# Altium PCB Backplane3_0.PcbDoc
Units mm, origin at the board's own origin, x right, y up, seen from the top; angles counter-clockwise.
Board outline 171.45 x 76.2 mm, 2 copper layers (Top Layer, Bottom Layer); 9 components, 8 nets, 151 pads, 0 vias.
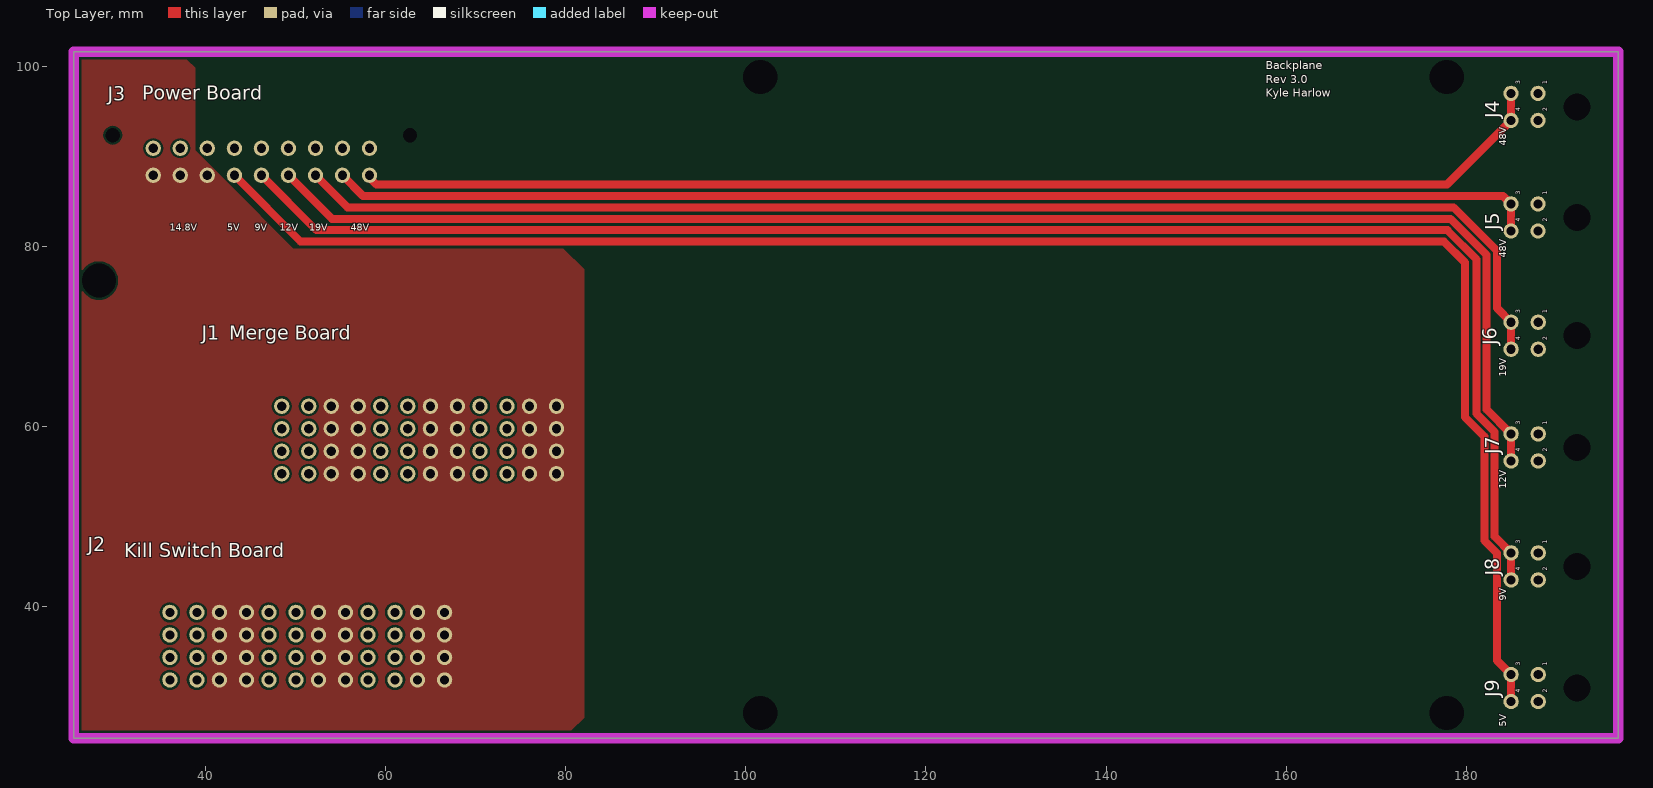
[diagram p0: Top Layer view]
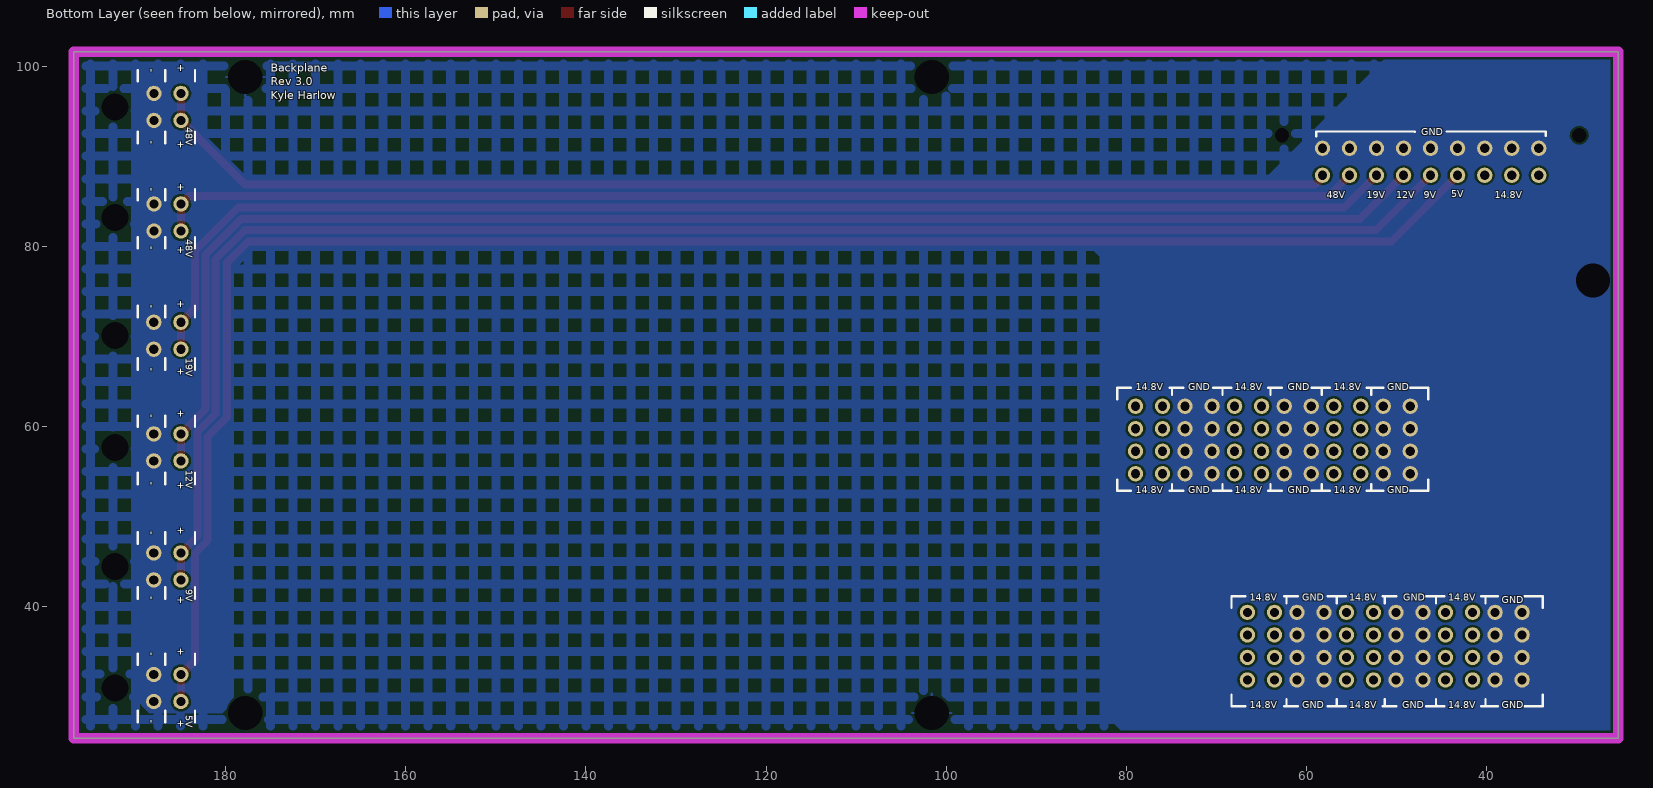
[diagram p1: Bottom Layer view, seen from below]
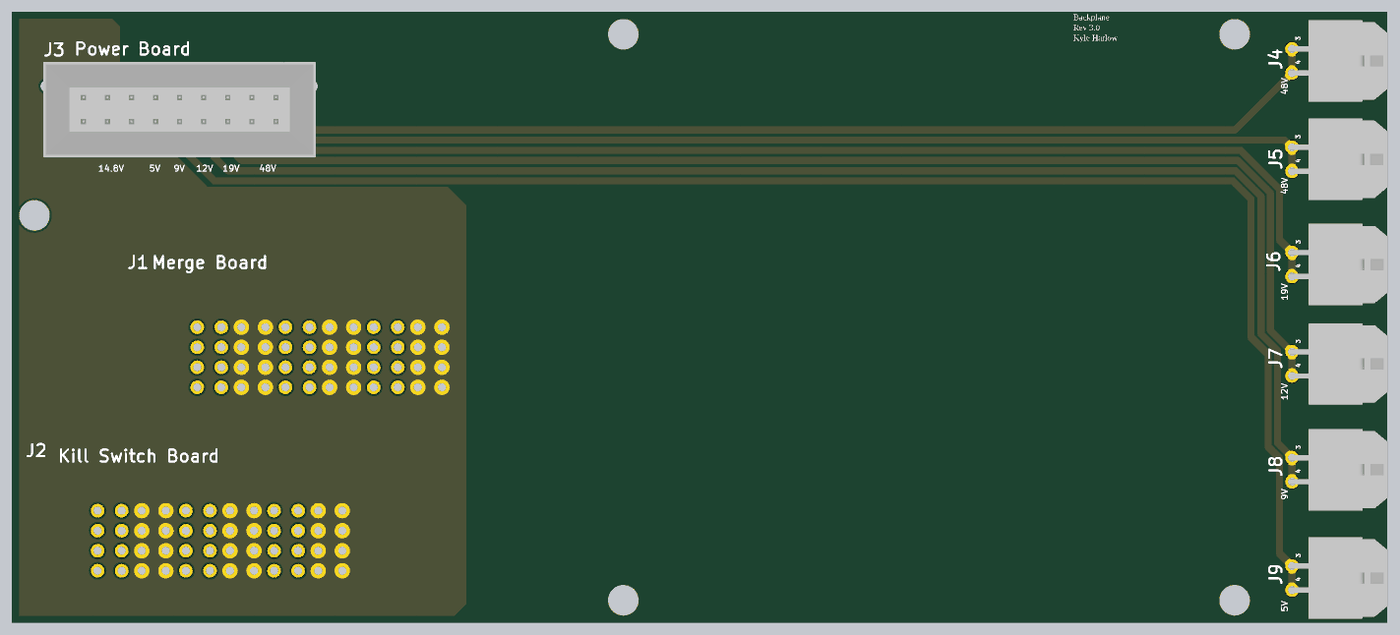
[diagram p2: 3D render of the assembled board from above, using the file's embedded part models]

## Layer stack, top to bottom
Top Solder: solder mask 0.0102, Solder Resist, Dk 3.5
Top Layer: signal copper 0.0356
Dielectric 1: dielectric 0.32, FR-4, Dk 4.8
Bottom Layer: signal copper 0.0356
Bottom Solder: solder mask 0.0102, Solder Resist, Dk 3.5

## Board outline
25.4,25.4 196.85,25.4 196.85,101.6 25.4,101.6

## Design rules (kind name [scope] priority, off if disabled: settings)
Clearance [All] p1: gap=0.254 ignorepadtopadclearanceinfootprint=FALSE
PolygonConnect PolygonConnect_5 [All vs IsNamedPolygon('Top Layer-14.8V') Or  IsNamedPolygon('Top Layer-No Net')] p1: thpad.connectstyle=Direct thpad.reliefconductorwidth=0.254 thpad.reliefentries=4 thpad.polygonreliefangle="90 Angle" thpad.airgapwidth=0.254 smdpad.connectstyle=Relief smdpad.reliefconductorwidth=0.254 smdpad.reliefentries=4 smdpad.polygonreliefangle="90 Angle" smdpad.airgapwidth=0.254 via.connectstyle=Relief via.reliefconductorwidth=0.254 via.reliefentries=4 via.polygonreliefangle="90 Angle" via.airgapwidth=0.254
PolygonConnect PolygonConnect_4 [All vs IsNamedPolygon('Bottom Layer-GND')] p2: thpad.connectstyle=Direct thpad.reliefconductorwidth=0.254 thpad.reliefentries=4 thpad.polygonreliefangle="90 Angle" thpad.airgapwidth=0.254 smdpad.connectstyle=Direct smdpad.reliefconductorwidth=0.254 smdpad.reliefentries=4 smdpad.polygonreliefangle="90 Angle" smdpad.airgapwidth=0.254 via.connectstyle=Relief via.reliefconductorwidth=0.254 via.reliefentries=4 via.polygonreliefangle="90 Angle" via.airgapwidth=0.254
PolygonConnect PolygonConnect_3 [All vs IsNamedPolygon('Bottom Layer-GND')] p3: thpad.connectstyle=NoConnect thpad.reliefconductorwidth=0.254 thpad.reliefentries=4 thpad.polygonreliefangle="90 Angle" thpad.airgapwidth=0.254 smdpad.connectstyle=Direct smdpad.reliefconductorwidth=0.254 smdpad.reliefentries=4 smdpad.polygonreliefangle="90 Angle" smdpad.airgapwidth=0.254 via.connectstyle=Relief via.reliefconductorwidth=0.254 via.reliefentries=4 via.polygonreliefangle="90 Angle" via.airgapwidth=0.254
PolygonConnect PolygonConnect_2 [All vs IsNamedPolygon('Bottom Layer-GND')] p4: thpad.connectstyle=Direct thpad.reliefconductorwidth=0.254 thpad.reliefentries=4 thpad.polygonreliefangle="90 Angle" thpad.airgapwidth=0.254 smdpad.connectstyle=Relief smdpad.reliefconductorwidth=0.254 smdpad.reliefentries=4 smdpad.polygonreliefangle="90 Angle" smdpad.airgapwidth=0.254 via.connectstyle=Relief via.reliefconductorwidth=0.254 via.reliefentries=4 via.polygonreliefangle="90 Angle" via.airgapwidth=0.254
PolygonConnect PolygonConnect_1 [All vs IsNamedPolygon('Bottom Layer- GND')] p5: thpad.connectstyle=Direct thpad.reliefconductorwidth=0.254 thpad.reliefentries=4 thpad.polygonreliefangle="90 Angle" thpad.airgapwidth=0.254 smdpad.connectstyle=Direct smdpad.reliefconductorwidth=0.254 smdpad.reliefentries=4 smdpad.polygonreliefangle="90 Angle" smdpad.airgapwidth=0.254 via.connectstyle=Relief via.reliefconductorwidth=0.254 via.reliefentries=4 via.polygonreliefangle="90 Angle" via.airgapwidth=0.254
PolygonConnect [All] p6: connectstyle=Relief reliefconductorwidth=0.254 reliefentries=4 polygonreliefangle="90 Angle" airgapwidth=0.254
RoutingVias [All] p1: holewidth=0.711 width=1.27 viastyle="Through Hole" minholewidth=0.711 minwidth=1.27 maxholewidth=0.711 maxwidth=1.27
SolderMaskExpansion [All] p1: expansion=0.102
Width [All] p1: maxlimit=40 minlimit=0.381 preferedwidth=0.889 bottomlayer_prefwidth=0.4 minimp=50.000000 maximp=50.000000 favimp=50.000000
30 further rules are at their usual default settings.

## Classes and differential pairs
component class Backplane3_0: J1 J2 J4 J5 J6 J7 J8 J9

## Components (designator, comment, footprint, x,y, rotation, side; value= is the part's Value field where it differs from the comment)
J1 "Molex464652-1150" PCBComponent_1 78.985,62.258 r180 top
J2 "Molex464652-1150" PCBComponent_1 66.568,39.37 r180 top
J3 "Molex44432-1801" Molex44432-1801 29.227,83.439 r0 top
J4 "Molex 43045-0402" Molex43045-0402 187.944,93.98 r90 top
J5 "Molex 43045-0402" Molex43045-0402 187.944,81.709 r90 top
J6 "Molex 43045-0402" Molex43045-0402 187.96,68.58 r90 top
J7 "Molex 43045-0402" Molex43045-0402 187.96,56.182 r90 top
J8 "Molex 43045-0402" Molex43045-0402 187.96,42.974 r90 top
J9 "Molex 43045-0402" Molex43045-0402 187.96,29.464 r90 top

## Footprints (in the part's own frame and the unit in brackets; to place one, negate y for a bottom-side part, rotate by r counter-clockwise, add the part's x,y. Pads: shape width x height; smd on the part's side, far side on the other; paste and mask are expansions set on the pad)
Molex43045-0402 [mm] "43045-0402"
  round 1.7 hole 1.02: 1(3,0) 2(0,0) 3(3,3) 4(0,3)
  round 0.254 hole 3 unplated: ""(1.5,-4.32)
  body extent -3.57,-8.95 6.58,3.29, height 8.83
Molex44432-1801 [mm]
  round 1.7 hole 1.02: 1(29.001,4.445) 2(26.001,4.445) 3(23.001,4.445) 4(20.001,4.445) 5(17.001,4.445) 6(14.001,4.445) 7(11.001,4.445) 8(8.001,4.445) 9(5.001,4.445) 10(29.001,7.445) 11(26.001,7.445) 12(23.001,7.445) 13(20.001,7.445) 14(17.001,7.445) 15(14.001,7.445) 16(11.001,7.445) 17(8.001,7.445) 18(5.001,7.445)
  round 1 hole 1.57 unplated: ""(0.501,8.895) ""(33.503,8.89)
  body extent 0.07,0.03 34.07,11.93, height 11.8
PCBComponent_1 [mm]
  round 1.7 hole 1.02: 1(27.5,0) 1(27.5,2.5) 1(27.5,5) 1(27.5,7.5) 1(30.5,0) 1(30.5,2.5) 1(30.5,5) 1(30.5,7.5) 2(22,0) 2(22,2.5) 2(22,5) 2(22,7.5) 2(25,0) 2(25,2.5) 2(25,5) 2(25,7.5) 3(16.5,0) 3(16.5,2.5) 3(16.5,5) 3(16.5,7.5) 3(19.5,0) 3(19.5,2.5) 3(19.5,5) 3(19.5,7.5) 4(11,7.5) 4(11,0) 4(11,2.5) 4(11,5) 4(14,0) 4(14,2.5) 4(14,5) 4(14,7.5) 5(5.5,5) 5(5.5,7.5) 5(5.5,0) 5(5.5,2.5) 5(8.5,7.5) 5(8.5,0) 5(8.5,2.5) 5(8.5,5) 6(0,7.5) 6(0,5) 6(0,2.5) 6(0,0) 6(3,7.5) 6(3,5) 6(3,2.5) 6(3,0)

## Part data
J1 J2: library part Molex46562-1150, "2.54mm, 5.50mm Pitch EXTreme Ten60Power Vertical Receptacle Assembly with Guide Receivers, 6 Power Circuits", ComponentLink1Description="Molex Website", ComponentLink1URL=https://www.molex.com/molex/products/datasheet.jsp?part=active/0465621150_PCB_RECEPTACLES.xml
J4 J5 J6 J7 J8 J9: library part Molex43045-0402, "Micro-Fit 3.0 Right Angle Header, 3.00mm Pitch, Dual Row, 4 Circuits, with Snap-in Plastic Peg PCB Lock, Gold, Glow Wire Capable, Black", ComponentLink1Description="Molex Website", ComponentLink1URL=https://www.molex.com/molex/products/datasheet.jsp?part=active/0430450402_PCB_HEADERS.xml

## Free pads (board coordinates)
  round 1.524 hole 3.81: ""(28.194,76.2) ""(101.6,28.194) ""(101.6,98.806) ""(177.8,28.194) ""(177.8,98.806)

## Nets (pads, with @x,y where several pads share a name; then routed paths per layer and width w, separated by ;. In a path a pad name is that pad's centre, name@x,y a point inside that pad or via, vN(x,y) a via of type N, cw(c..) or ccw(c..) an arc to the next point about the centre after c; other vN are vias at no path point)
5V: J3.6 J9.3 J9.4 | length 191.5
  Top Layer w0.889: J3.6 50.594,80.518 177.523,80.518 179.832,78.209 179.832,61.028 181.991,58.869 181.991,47.327 183.388,45.93 183.388,34.036 J9.3 J9.4
9V: J3.5 J8.3 J8.4 | length 175.9
  Top Layer w0.889: J3.5 52.324,81.788 177.869,81.788 181.102,78.555 181.102,61.424 183.134,59.392 183.134,47.8 J8.3 J8.4
12V: J3.4 J7.3 J7.4 | length 160.7
  Top Layer w0.889: J3.4 54.054,83.058 178.216,83.058 182.245,79.029 182.245,61.897 J7.3 J7.4
14.8V: J1.2 J1.4 J1.6 J2.2 J2.4 J2.6 J3.7 J3.8 J3.9
19V: J3.3 J6.3 J6.4 | length 146.2
  Top Layer w0.889: J3.3 55.784,84.328 178.562,84.328 183.388,79.502 183.388,73.152 J6.3 J6.4
48V_1: J3.1 J4.3 J4.4 | length 133
  Top Layer w0.889: J3.1@58.228,87.63 58.99,86.868 177.832,86.868 J4.4 J4.3
48V_2: J3.2 J5.3 J5.4 | length 134
  Top Layer w0.889: J3.2 57.514,85.598 184.055,85.598 J5.3 J5.4
GND: J1.1 J1.3 J1.5 J2.1 J2.3 J2.5 J3.10 J3.11 J3.12 J3.13 J3.14 J3.15 J3.16 J3.17 J3.18 J4.1 J4.2 J5.1 J5.2 J6.1 J6.2 J7.1 J7.2 J8.1 J8.2 J9.1 J9.2 pad.@28.194,76.2 pad.@101.6,28.194 pad.@177.8,98.806
pads on no net: J3. J4. J5. J6. J7. J8. J9.

## Polygon pours and split planes (outlines as drawn)
14.8V on Top Layer "Top Layer-14.8V" (solid, pour order 14): 79.756,79.756 82.042,77.47 82.042,27.686 79.756,25.4 25.441,25.4 25.441,26.756 25.4,26.797 25.4,83.058 25.4,101.6 37.084,101.6 38.862,99.822 38.862,90.678 49.784,79.756
no net on Top Layer "Top Layer-No Net" (solid, pour order 6): 34.925,25.4
GND on Bottom Layer "Bottom Layer- GND" (solid, pour order 12): 177.546,87.63 182.626,92.71 182.626,100.33 190.152,100.33 190.152,29.878 188.468,28.194 180.34,28.194 179.07,29.464 179.07,77.371 176.685,79.756 83.82,79.756 82.042,77.978 82.042,27.686 79.756,25.4 45.593,25.4 25.4,25.4 25.4,101.6 50.546,101.6 64.516,87.63
GND on Bottom Layer "Bottom Layer-GND 2" (hatched 90Degree grid 2.5 track 1, remove dead copper, pour order 10): 25.4,25.4 25.4,101.6 196.85,101.6 196.85,25.4

## Keep-outs
Keep-Out Layer:
  the board outline again, w1.2

## Silkscreen, mask and mechanical layers (free items; w line width, h text height)
Top Overlay:
  text "Power Board" at 33.02,96.266 h1.52
  text "Backplane  / Rev 3.0 / Kyle Harlow" at 157.734,96.266 h1.52
  text "48V" at 184.404,91.186 h0.76 r90
  text "14.8V" at 36.068,81.709 h0.76
  text "5V" at 42.418,81.709 h0.76
  text "9V" at 45.466,81.709 h0.76
  text "12V" at 48.26,81.709 h0.76
  text "19V" at 51.562,81.709 h0.76
  text "48V" at 56.134,81.709 h0.76
  text "48V" at 184.404,78.74 h0.76 r90
  text "Merge Board" at 42.672,69.62 h1.52
  text "19V" at 184.404,65.532 h0.76 r90
  text "12V" at 184.404,53.086 h0.76 r90
  text "Kill Switch Board" at 30.988,45.466 h1.52
  text "9V" at 184.404,40.64 h0.76 r90
  text "5V" at 184.404,26.67 h0.76 r90
Bottom Overlay:
  lines w0.254: 33.439,92.25 33.439,92.758 44.45,92.758 ; 33.782,30.226 33.782,28.956 35.785,28.956 ; 33.782,39.878 33.782,41.148 35.785,41.148 ; 38.785,28.956 40.64,28.956 ; 38.785,41.148 40.64,41.148 ; 40.132,28.956 40.132,29.718 ; 40.132,40.386 40.132,41.148 ; 44.704,28.956 46.736,28.956 ; 44.704,41.148 46.736,41.148 ; 45.466,28.956 45.624,29.114 45.624,29.718 ; 45.624,40.386 45.624,40.99 ; 46.482,54.126 46.482,52.856 48.485,52.856 ; 46.482,63.016 46.482,64.286 48.485,64.286 ; 48.006,92.707 58.928,92.756 58.928,92.202 ; 50.038,28.956 51.562,28.956 ; 50.038,41.148 51.562,41.148 ; 51.308,28.956 51.308,29.718 ; 51.308,40.386 51.308,41.148 ; 51.485,52.856 53.34,52.856 ; 51.485,64.286 53.34,64.286 ; 52.832,52.856 52.832,53.618 ; 52.832,63.524 52.832,64.286 ; 55.626,28.956 57.658,28.956 ; 55.626,41.148 57.658,41.148 ; 56.642,28.956 56.642,29.718 ; 56.642,40.386 56.642,41.148 ; 57.404,52.856 59.436,52.856 ; 57.404,64.286 59.436,64.286 ; 58.324,53.014 58.324,53.618 ; 58.324,63.524 58.324,64.128 ; 60.96,28.956 62.484,28.956 ; 60.96,41.148 62.484,41.148 ; 62.23,28.956 62.23,29.718 ; 62.23,40.386 62.23,41.148 ; 62.738,52.856 64.262,52.856 ; 62.738,64.286 64.262,64.286 ; 64.008,52.856 64.008,53.618 ; 64.008,63.524 64.008,64.286 ; 66.802,28.956 68.326,28.956 68.326,29.718 68.326,30.226 ; 66.802,41.148 68.326,41.148 68.326,40.386 68.326,39.878 ; 68.326,52.856 70.358,52.856 ; 68.326,64.286 70.358,64.286 ; 69.342,52.856 69.342,53.618 ; 69.342,63.524 69.342,64.286 ; 73.66,52.856 75.184,52.856 ; 73.66,64.286 75.184,64.286 ; 74.93,52.856 74.93,53.618 ; 74.93,63.524 74.93,64.286 ; 79.502,52.856 81.026,52.856 81.026,53.618 81.026,54.126 ; 79.502,64.286 81.026,64.286 81.026,63.524 81.026,63.016 ; 183.388,27.178 183.388,28.448 ; 183.388,33.528 183.388,34.798 ; 183.388,40.894 183.388,42.164 ; 183.388,46.99 183.388,48.26 ; 183.388,53.594 183.388,54.864 ; 183.388,59.944 183.388,61.214 ; 183.388,66.294 183.388,67.564 ; 183.388,72.136 183.388,73.406 ; 183.388,79.756 183.388,81.026 ; 183.388,85.09 183.388,86.36 ; 183.388,91.44 183.388,92.71 ; 183.388,98.298 183.388,99.568 ; 186.69,27.178 186.69,28.448 ; 186.69,33.528 186.69,34.798 ; 186.69,40.894 186.69,42.164 ; 186.69,46.99 186.69,48.26 ; 186.69,53.594 186.69,54.864 ; 186.69,59.944 186.69,61.214 ; 186.69,66.294 186.69,67.564 ; 186.69,72.136 186.69,73.406 ; 186.69,79.756 186.69,81.026 ; 186.69,85.09 186.69,86.36 ; 186.69,91.44 186.69,92.71 ; 186.69,98.298 186.69,99.568 ; 189.738,27.178 189.738,28.448 ; 189.738,33.528 189.738,34.798 ; 189.738,40.894 189.738,42.164 ; 189.738,46.99 189.738,48.26 ; 189.738,53.594 189.738,54.864 ; 189.738,59.944 189.738,61.214 ; 189.738,66.294 189.738,67.564 ; 189.738,72.136 189.738,73.406 ; 189.738,79.756 189.738,81.026 ; 189.738,85.09 189.738,86.36 ; 189.738,91.44 189.738,92.71 ; 189.738,98.298 189.738,99.568
  text "+" at 184.658,99.314 h0.76 r270
  text "-" at 187.96,99.314 h0.76 r270
  text "Backplane  / Rev 3.0 / Kyle Harlow" at 175.006,96.012 h1.52
  text "48V" at 184.404,93.218 h0.76 r90
  text "GND" at 47.244,92.334 h0.76
  text "+" at 184.658,91.694 h0.76 r270
  text "-" at 187.96,91.694 h0.76 r270
  text "+" at 184.658,86.106 h0.76 r270
  text "-" at 187.96,86.106 h0.76 r270
  text "5V" at 43.942,85.47 h0.76
  text "14.8V" at 39.116,85.344 h0.76
  text "9V" at 46.99,85.344 h0.76
  text "12V" at 50.038,85.344 h0.76
  text "19V" at 53.34,85.344 h0.76
  text "48V" at 57.785,85.344 h0.76
  text "48V" at 184.404,80.772 h0.76 r90
  text "+" at 184.658,80.01 h0.76 r270
  text "-" at 187.96,80.01 h0.76 r270
  text "+" at 184.658,73.152 h0.76 r270
  text "-" at 187.96,73.152 h0.76 r270
  text "19V" at 184.404,67.564 h0.76 r90
  text "+" at 184.658,66.548 h0.76 r270
  text "-" at 187.96,66.548 h0.76 r270
  text "GND" at 51.054,64.032 h0.76
  text "14.8V" at 56.985,64.032 h0.76
  text "GND" at 62.086,64.032 h0.76
  text "14.8V" at 67.985,64.032 h0.76
  text "GND" at 73.152,64.032 h0.76
  text "14.8V" at 78.985,64.032 h0.76
  text "+" at 184.658,60.96 h0.76 r270
  text "-" at 187.96,60.96 h0.76 r270
  text "12V" at 184.404,55.118 h0.76 r90
  text "+" at 184.658,53.848 h0.76 r270
  text "-" at 187.96,53.848 h0.76 r270
  text "GND" at 51.054,52.602 h0.76
  text "14.8V" at 56.985,52.602 h0.76
  text "GND" at 62.086,52.602 h0.76
  text "14.8V" at 67.985,52.602 h0.76
  text "GND" at 73.152,52.602 h0.76
  text "14.8V" at 78.985,52.602 h0.76
  text "+" at 184.658,48.006 h0.76 r270
  text "-" at 187.96,48.006 h0.76 r270
  text "9V" at 184.404,41.91 h0.76 r90
  text "+" at 184.658,41.148 h0.76 r270
  text "-" at 187.96,41.148 h0.76 r270
  text "14.8V" at 44.285,40.64 h0.76
  text "GND" at 49.276,40.64 h0.76
  text "14.8V" at 55.285,40.64 h0.76
  text "GND" at 60.452,40.64 h0.76
  text "14.8V" at 66.285,40.64 h0.76
  text "GND" at 38.354,40.386 h0.76
  text "+" at 184.658,34.544 h0.76 r270
  text "-" at 187.96,34.544 h0.76 r270
  text "GND" at 38.354,28.702 h0.76
  text "14.8V" at 44.285,28.702 h0.76
  text "GND" at 49.386,28.702 h0.76
  text "14.8V" at 55.285,28.702 h0.76
  text "GND" at 60.452,28.702 h0.76
  text "14.8V" at 66.285,28.702 h0.76
  text "5V" at 184.404,27.94 h0.76 r90
  text "+" at 184.658,27.432 h0.76 r270
  text "-" at 187.96,27.432 h0.76 r270

## Text inside footprints (layer, text, board x,y; h text height)
J4: Top Overlay "1" at 188.944,97.98 h0.5 r90; Top Overlay "2" at 188.944,94.98 h0.5 r90; Top Overlay "4" at 185.944,94.98 h0.5 r90; Top Overlay "3" at 185.944,97.98 h0.5 r90
J5: Top Overlay "1" at 188.944,85.709 h0.5 r90; Top Overlay "2" at 188.944,82.709 h0.5 r90; Top Overlay "4" at 185.944,82.709 h0.5 r90; Top Overlay "3" at 185.944,85.709 h0.5 r90
J6: Top Overlay "1" at 188.96,72.58 h0.5 r90; Top Overlay "2" at 188.96,69.58 h0.5 r90; Top Overlay "4" at 185.96,69.58 h0.5 r90; Top Overlay "3" at 185.96,72.58 h0.5 r90
J7: Top Overlay "1" at 188.96,60.182 h0.5 r90; Top Overlay "2" at 188.96,57.182 h0.5 r90; Top Overlay "4" at 185.96,57.182 h0.5 r90; Top Overlay "3" at 185.96,60.182 h0.5 r90
J8: Top Overlay "1" at 188.96,46.974 h0.5 r90; Top Overlay "2" at 188.96,43.974 h0.5 r90; Top Overlay "4" at 185.96,43.974 h0.5 r90; Top Overlay "3" at 185.96,46.974 h0.5 r90
J9: Top Overlay "1" at 188.96,33.464 h0.5 r90; Top Overlay "2" at 188.96,30.464 h0.5 r90; Top Overlay "4" at 185.96,30.464 h0.5 r90; Top Overlay "3" at 185.96,33.464 h0.5 r90